# EAGLE board Simon (EAGLE 7.2.0)
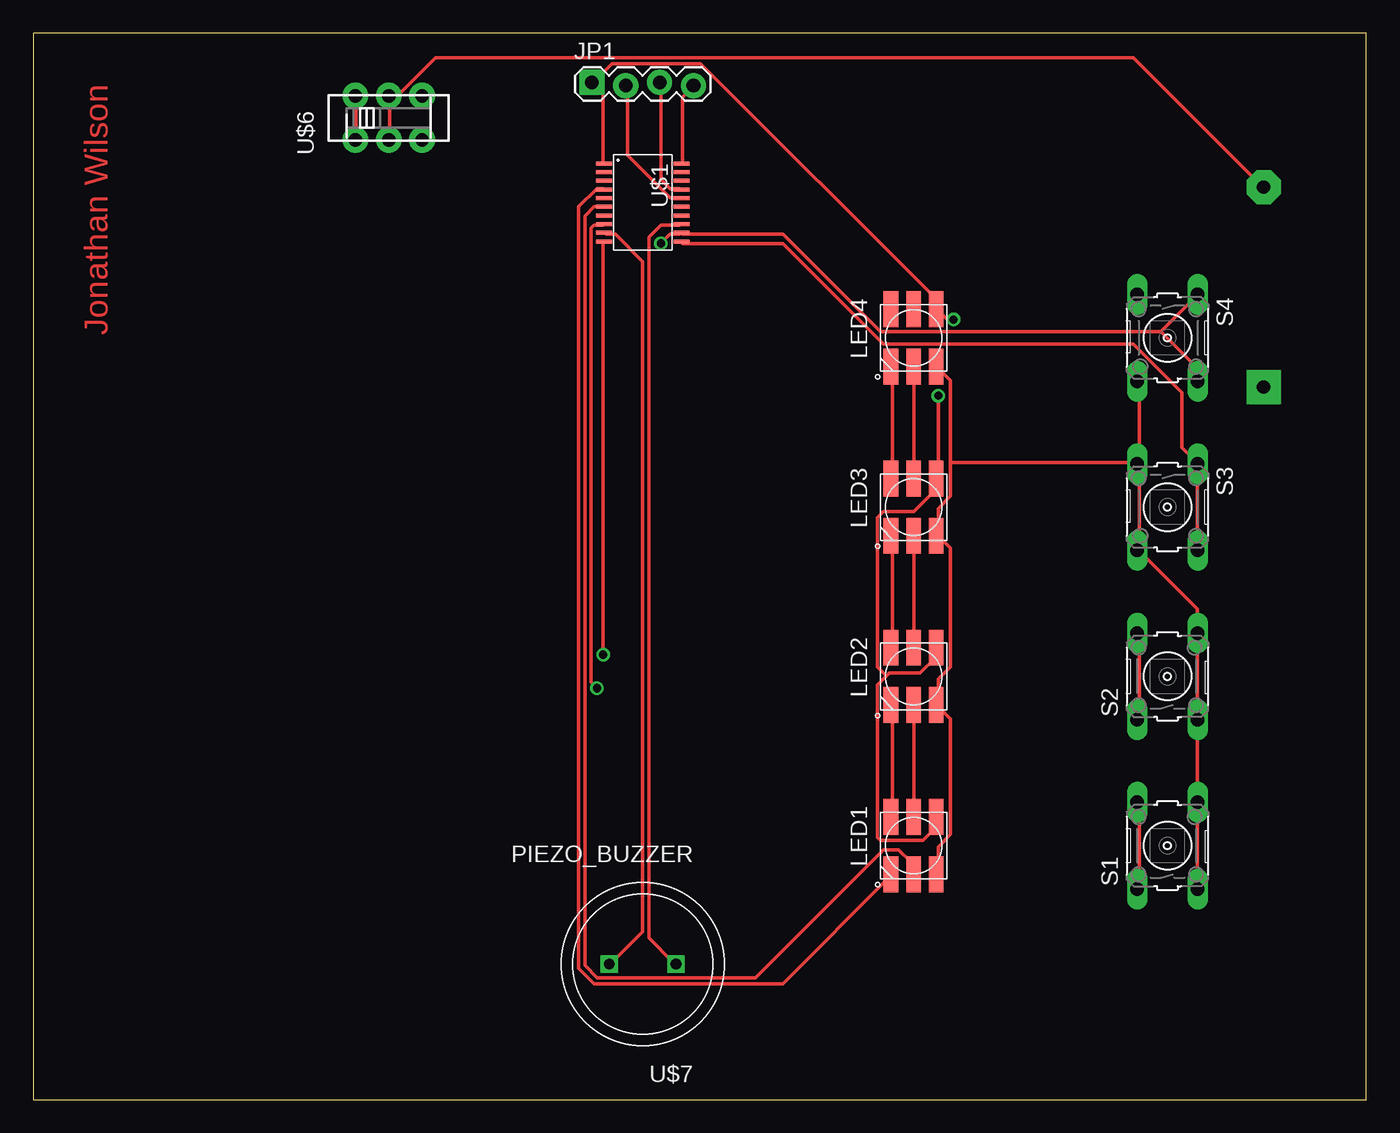
[diagram p0: board, top side]
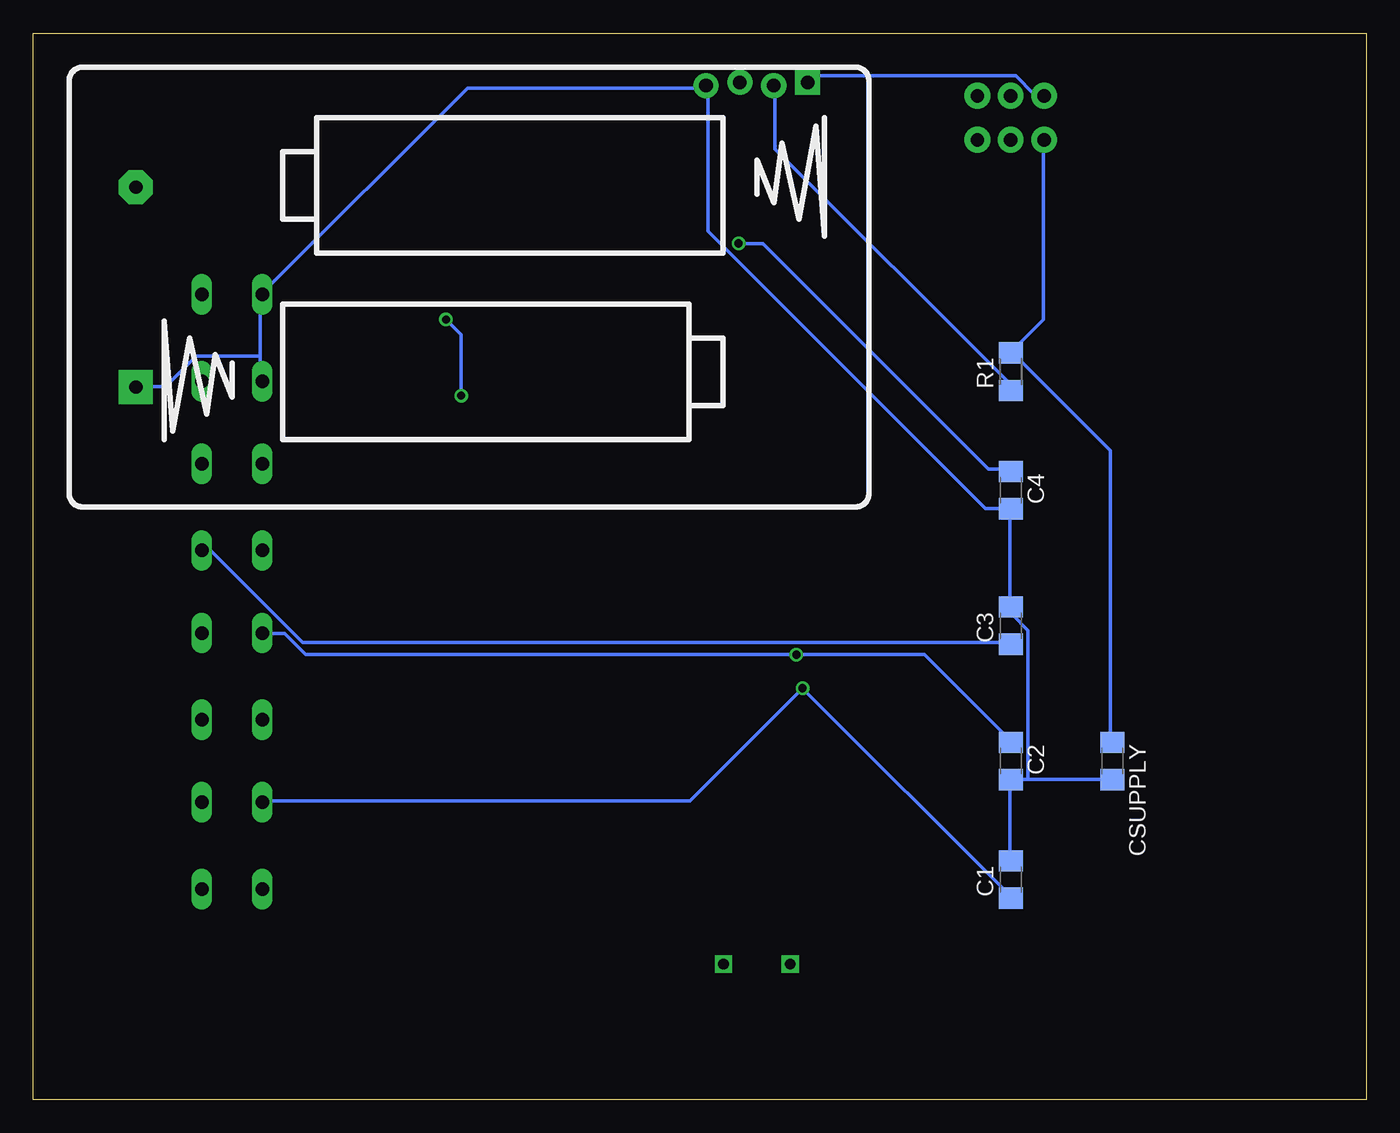
[diagram p1: board, bottom side, seen from below]

Size 100 x 80 mm. Coordinates in mm from the lower left corner, seen from the top.
Outline: 0,0 100,0 100,80 0,80 0,0
Copper layers (1*16): Top 0.035mm / dielectric 1.5mm / Bottom 0.035mm
Design rules "default": minimum track width 10mil, minimum drill 24mil, track to track 8mil, track to pad 8mil, pad to pad 8mil, via to via 8mil, smd to smd 8mil, copper to edge 40mil, drill to drill 8mil, minimum pad ring 10mil, minimum via ring 8mil, stop-mask expansion 4mil, vias tented up to drill 0mil, thermal gap 10mil

## Footprints (pad centres in the part's own frame; a part is rotated, then mirrored left to right if it is on the bottom)
BATTERY_PACK_2AA = drill 1 pad 2.54 octagon: 3V 7.5,25 | drill 1 pad 2.54 square: GND -7.5,25
C1206 = smd 1.6 x 1.8: 1 -1.4,0; 2 1.4,0
1X04_LOCK = drill 1.016 pad 1.88 square: 1 0,0.127 | drill 1.016 pad 1.88: 2 2.54,-0.127; 3 5.08,0.127; 4 7.62,-0.127
5050 = smd 2.68 x 1.1: 1 -2.15,1.7; 2 -2.15,0; 3 -2.15,-1.7; 4 2.15,-1.7; 5 2.15,0; 6 2.15,1.7
R1206 = smd 1.6 x 1.803: 1 -1.422,0; 2 1.422,0
B3F-10XX = drill 1.016 long: 1 -3.251,2.261; 2 3.251,2.261; 3 -3.251,-2.261; 4 3.251,-2.261
PW20 = smd 0.3 x 1.2: 1 -2.925,-2.9; 2 -2.275,-2.9; 3 -1.625,-2.9; 4 -0.975,-2.9; 5 -0.325,-2.9; 6 0.325,-2.9; 7 0.975,-2.9; 8 1.625,-2.9; 9 2.275,-2.9; 10 2.925,-2.9; 11 2.925,2.9; 12 2.275,2.9; 13 1.625,2.9; 14 0.975,2.9; 15 0.325,2.9; 16 -0.325,2.9; 17 -0.975,2.9; 18 -1.625,2.9; 19 -2.275,2.9; 20 -2.925,2.9
JS_DPDT_TH = drill 1 pad 1.93: 1 -2.5,-1.65; 2 0,-1.65; 3 2.5,-1.65; 4 -2.5,1.65; 5 0,1.65; 6 2.5,1.65
PIEZO_BUZZER = drill 0.8 square: P$1 -2.5,0; P$2 2.5,0

## Placement (x,y rotation side)
BAT1  [BATTERY_PACK_2AA]  67.31,60.96 90 bottom
C1  [C1206]  26.67,16.51 90 bottom
C2  [C1206]  26.67,25.4 270 bottom
C3  [C1206]  26.67,35.56 90 bottom
C4  [C1206]  26.67,45.72 270 bottom
CSUPPLY  [C1206]  19.05,25.4 270 bottom
JP1  [1X04_LOCK]  41.91,76.2 0 top
LED1  APA102  [5050]  66.04,19.05 90 top
LED2  APA102  [5050]  66.04,31.75 90 top
LED3  APA102  [5050]  66.04,44.45 90 top
LED4  APA102  [5050]  66.04,57.15 90 top
R1  [R1206]  26.67,54.61 90 bottom
S1  [B3F-10XX]  85.09,19.05 90 top
S2  [B3F-10XX]  85.09,31.75 90 top
S3  [B3F-10XX]  85.09,44.45 270 top
S4  [B3F-10XX]  85.09,57.15 270 top
U$1  MSP430G2XX3TSSOP  [PW20]  45.72,67.31 270 top
U$6  SWITCH_DPDT  [JS_DPDT_TH]  26.67,73.66 0 top
U$7  PIEZO_BUZZER  [PIEZO_BUZZER]  45.72,10.16 180 top

## Library data of the parts
BAT1 LED1-LED4 U$1 U$6 U$7 = ELEC327
C1-C4 CSUPPLY = rcl
JP1 = SparkFun
R1 = resistor
S1-S4 = switch-omron; MPN: B3F-1000; OC_FARNELL: 176432; OC_NEWARK: 36M3542

## Nets
BAT_VCC: BAT1.3V U$6.2 U$6.5
GND: BAT1.GND C1.2 C2.2 C3.2 C4.2 CSUPPLY.2 JP1.4 LED1.3 LED2.3 LED3.3 LED4.3 S1.3 S1.4 S2.3 S2.4 S3.3 S3.4 S4.3 S4.4 U$1.20
N$1: LED1.6 LED2.1
N$2: LED1.5 LED2.2
N$3: LED2.6 LED3.1
N$4: LED2.5 LED3.2
N$5: LED3.6 LED4.1
N$6: LED3.5 LED4.2
N$7: LED1.1 U$1.4
N$8: LED1.2 U$1.6
N$10: U$1.9 U$7.P$2
N$11: U$1.13 U$7.P$1
N$13: C1.1 S1.1 S1.2 U$1.8
N$14: C2.1 S2.1 S2.2 U$1.10
N$15: C3.1 S3.1 S3.2 U$1.11
N$16: C4.1 S4.1 S4.2 U$1.12
RST: JP1.2 R1.1 U$1.16
TEST: JP1.3 U$1.17
VCC: CSUPPLY.1 JP1.1 LED1.4 LED2.4 LED3.4 LED4.4 R1.2 U$1.1 U$6.1 U$6.4

## Tracks (layer width: path | path; a pad name or v marks a point on that pad's centre or on a via)
BAT_VCC
  Top 0.254: U$6.2 26.75,72.24 26.75,75.21 U$6.5 26.75,75.44 27.43,75.44 30.18,78.18 82.53,78.18 92.13,68.58 BAT1.3V
GND
  Top 0.254: LED1.3 67.89,16.92 67.89,18.97 68.81,19.89 68.81,28.57 67.89,29.49 LED2.3 67.89,29.72 67.89,31.55 68.81,32.46 68.81,41.38 67.89,42.29 LED3.3 67.89,42.52 67.89,44.35 68.81,45.26 68.81,47.78 | 68.81,47.78 68.81,53.95 67.89,54.86 LED4.3 | S1.3 87.33,16 87.33,22.17 S1.4 87.33,22.4 87.33,28.35 S2.3 87.33,28.57 87.33,34.98 S2.4 87.33,35.2 87.33,36.8 82.98,41.15 S3.4 82.98,41.38 82.98,47.55 S3.3 | U$1.20 48.69,70.18 48.69,75.21 49.38,75.89 JP1.4 | S4.4 82.98,53.72 82.98,47.78 S3.3 | 68.81,47.78 82.75,47.78 S3.3
  Bottom 0.254: 25.38,24 26.52,24 C2.2 26.75,23.77 26.75,18.06 C1.2 | 25.38,24 19.2,24 CSUPPLY.2 | 25.38,24 25.38,35.2 26.52,36.35 26.52,36.8 C3.2 26.75,37.03 26.75,44.12 C4.2 26.75,44.35 28.57,44.35 49.38,65.15 49.38,75.89 JP1.4 49.61,75.89 67.44,75.89 82.75,60.58 S4.3 82.98,60.35 82.98,55.78 | 82.98,55.78 82.98,53.95 S4.4 | 82.98,55.78 87.78,55.78 90.07,53.49 92.13,53.49 BAT1.GND
N$1
  Top 0.254: LED1.6 64.47,21.26 64.47,29.49 LED2.1
N$2
  Top 0.254: LED1.5 66.06,21.26 66.06,29.49 LED2.2
N$3
  Top 0.254: LED2.6 64.47,34.06 64.47,42.29 LED3.1
N$4
  Top 0.254: LED2.5 66.06,34.06 66.06,42.29 LED3.2
N$5
  Top 0.254: LED3.6 64.47,46.63 64.47,54.86 LED4.1
N$6
  Top 0.254: LED3.5 66.06,46.63 66.06,54.86 LED4.2
N$7
  Top 0.254: U$1.4 42.75,68.35 42.29,68.35 40.92,66.98 40.92,9.83 42.06,8.69 56.24,8.69 64.24,16.69 LED1.1
N$8
  Top 0.254: U$1.6 42.75,66.98 42.06,66.98 41.38,66.29 41.38,10.06 42.29,9.14 54.18,9.14 63.78,18.75 64.92,18.75 65.84,17.83 65.84,16.92 LED1.2
N$10
  Top 0.254: U$1.9 42.98,64.92 43.66,64.92 45.72,62.87 45.72,12.57 43.43,10.29 U$7.P$2
N$11
  Top 0.254: U$1.13 48.46,65.61 47.09,65.61 46.18,64.69 46.18,12.12 48.01,10.29 U$7.P$1
N$13  (via drill 0.61)
  Top 0.254: S1.1 82.98,16 82.98,22.17 S1.2 | v42.29,30.86 41.83,31.32 41.83,65.38 42.06,65.61 42.75,65.61 U$1.8
  Bottom 0.254: C1.1 26.75,15.32 v42.29,30.86 50.75,22.4 82.75,22.4 S1.2
N$14  (via drill 0.61)
  Top 0.254: S2.1 82.98,28.57 82.98,34.98 S2.2 | v42.75,33.38 42.75,64.24 U$1.10
  Bottom 0.254: C2.1 26.75,26.98 33.15,33.38 v42.75,33.38 79.55,33.38 81.15,34.98 82.75,34.98 S2.2
N$15
  Top 0.254: U$1.11 48.69,64.24 56.24,64.24 63.78,56.69 82.53,56.69 86.18,53.03 86.18,48.92 87.33,47.78 S3.1 87.33,47.55 87.33,41.38 S3.2
  Bottom 0.254: C3.1 26.75,34.29 79.78,34.29 86.64,41.15 87.33,41.15 S3.2
N$16  (via drill 0.61)
  Top 0.254: 84.58,57.61 63.55,57.61 56.24,64.92 48.69,64.92 U$1.12 48.46,64.92 47.78,64.92 v47.09,64.24 | 84.58,57.61 87.33,60.35 S4.1 | 84.58,57.61 87.33,54.86 87.33,53.95 S4.2
  Bottom 0.254: v47.09,64.24 45.26,64.24 28.35,47.32 26.75,47.32 C4.1
RST
  Top 0.254: U$1.16 48.46,67.67 47.78,67.67 44.58,70.87 44.58,75.89 JP1.2
  Bottom 0.254: R1.1 26.75,53.26 26.75,53.72 44.35,71.32 44.35,75.89 JP1.2
TEST
  Top 0.254: U$1.17 48.46,68.35 47.78,68.35 47.09,69.04 47.09,76.12 JP1.3
VCC  (via drill 0.61)
  Top 0.254: U$6.1 24.23,72.24 24.23,75.21 U$6.4 | 64.01,31.77 64.24,32 66.52,32 67.67,33.15 67.67,33.83 LED2.4 | 64.01,31.77 63.32,31.09 63.32,19.66 63.55,19.43 66.75,19.43 67.67,20.34 67.67,21.03 LED1.4 | 64.01,31.77 63.32,32.46 63.32,43.66 63.78,44.12 66.06,44.12 67.67,45.72 67.67,46.41 LED3.4 67.89,46.63 v67.89,52.81 | U$1.1 42.75,70.18 42.75,75.44 42.06,76.12 JP1.1 42.06,76.35 43.43,77.72 50.06,77.72 67.67,60.12 67.67,59.44 LED4.4 67.89,59.21 68.58,58.52 v69.04,58.52
  Bottom 0.254: CSUPPLY.1 19.2,26.98 19.2,48.69 26.52,56.01 R1.2 26.52,56.24 24.23,58.52 24.23,72.01 U$6.1 | v67.89,52.81 67.89,57.38 v69.04,58.52 | U$6.4 24.23,75.44 24.92,75.44 26.29,76.81 41.38,76.81 41.83,76.35 JP1.1

## Text on the board
Top: Jonathan Wilson